# EAGLE board DCF77_RX_1V0 (EAGLE 7.7.0)
UFBmod - the best digital modulation ever created :-)
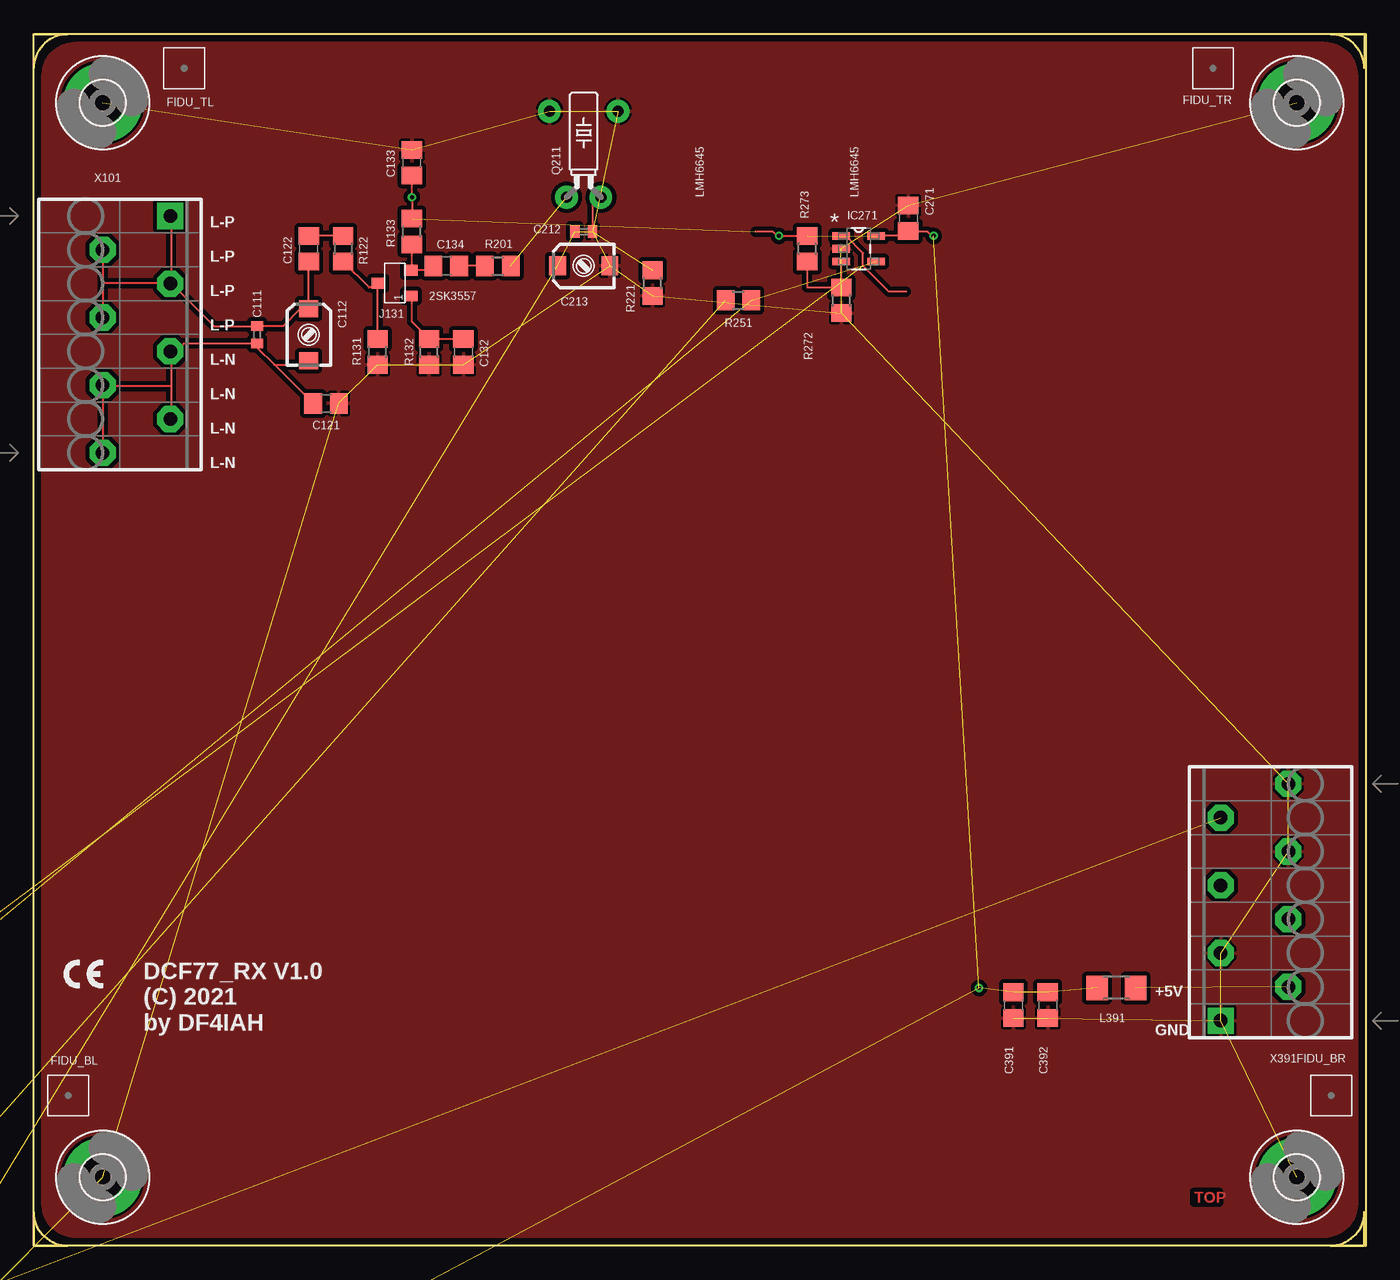
[diagram p0: board, top side]
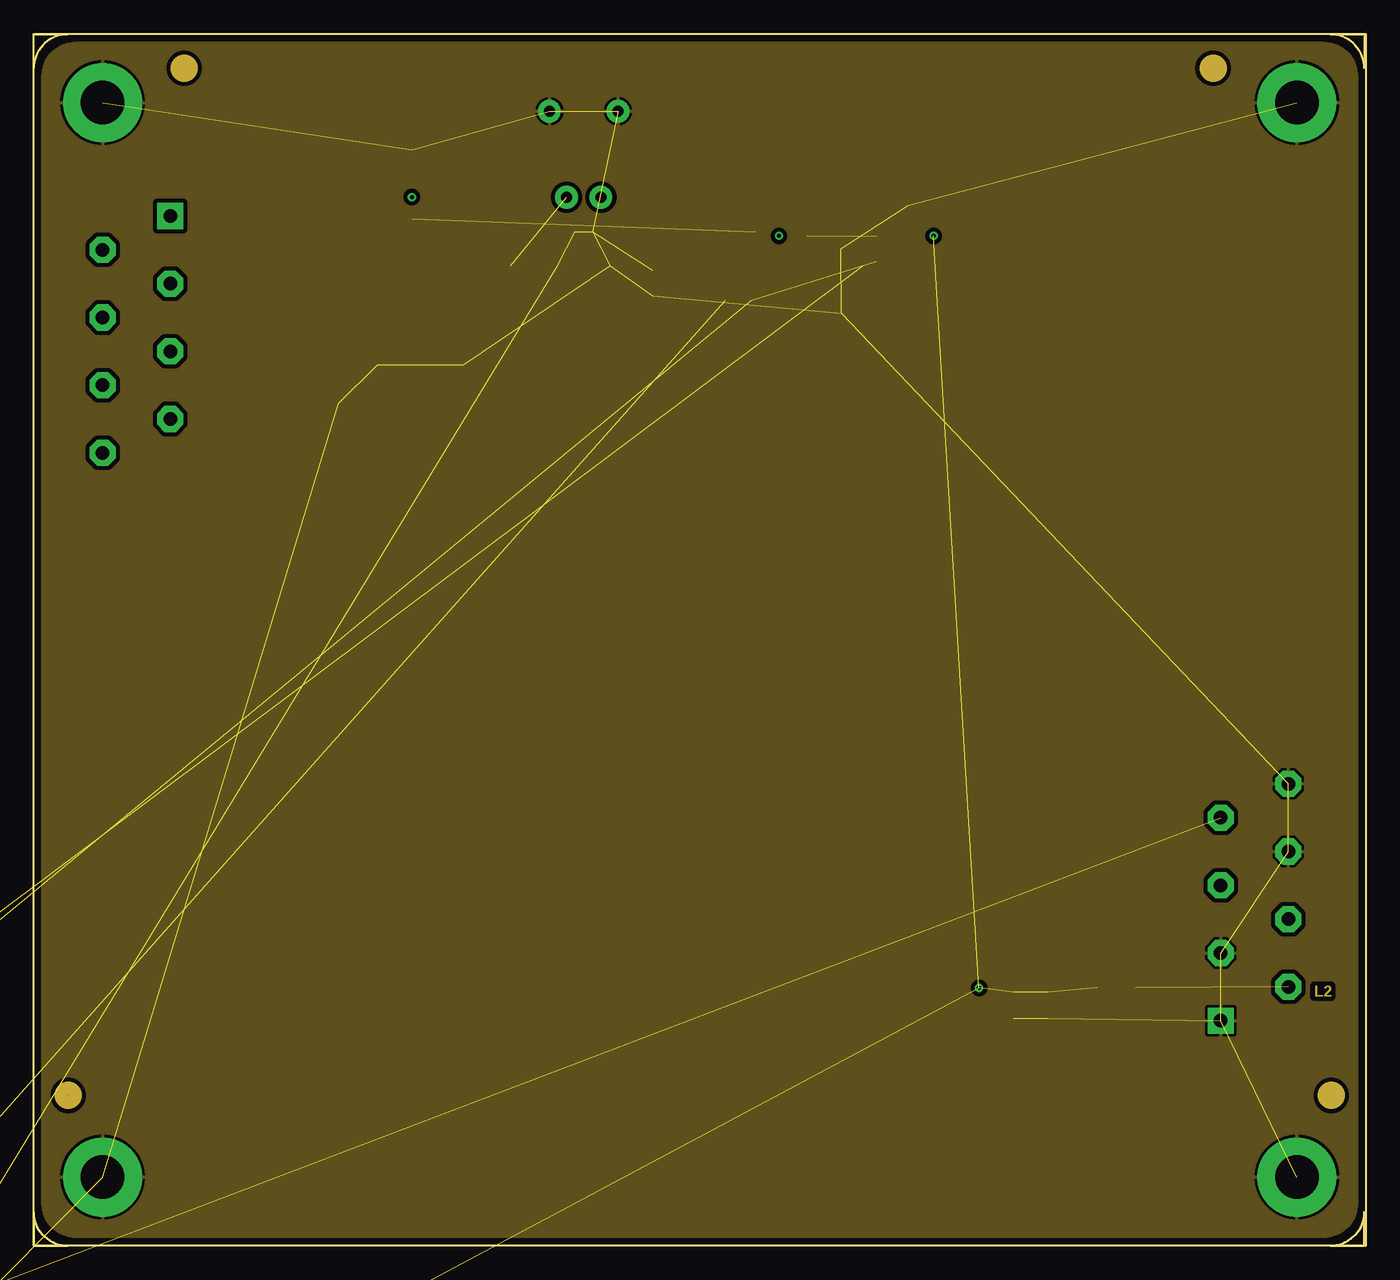
[diagram p1: board, inner layer Route2__GND_Pair_AVSS]
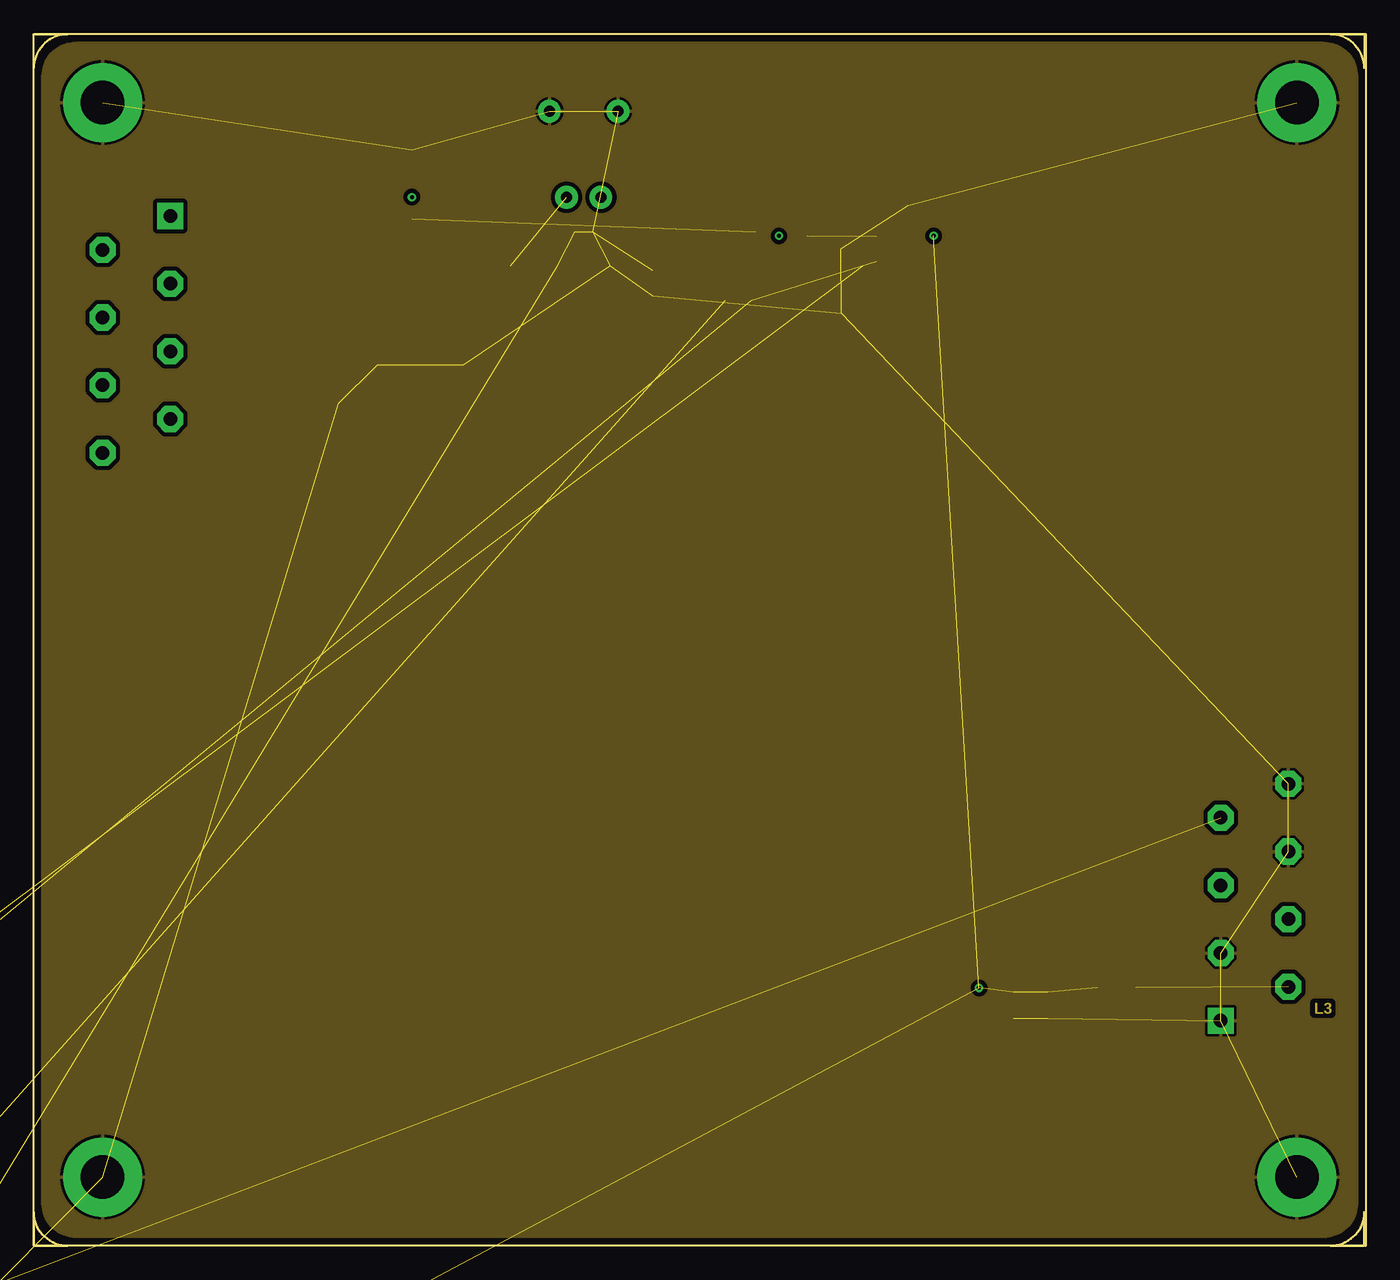
[diagram p2: board, inner layer Route3__SigC_GND]
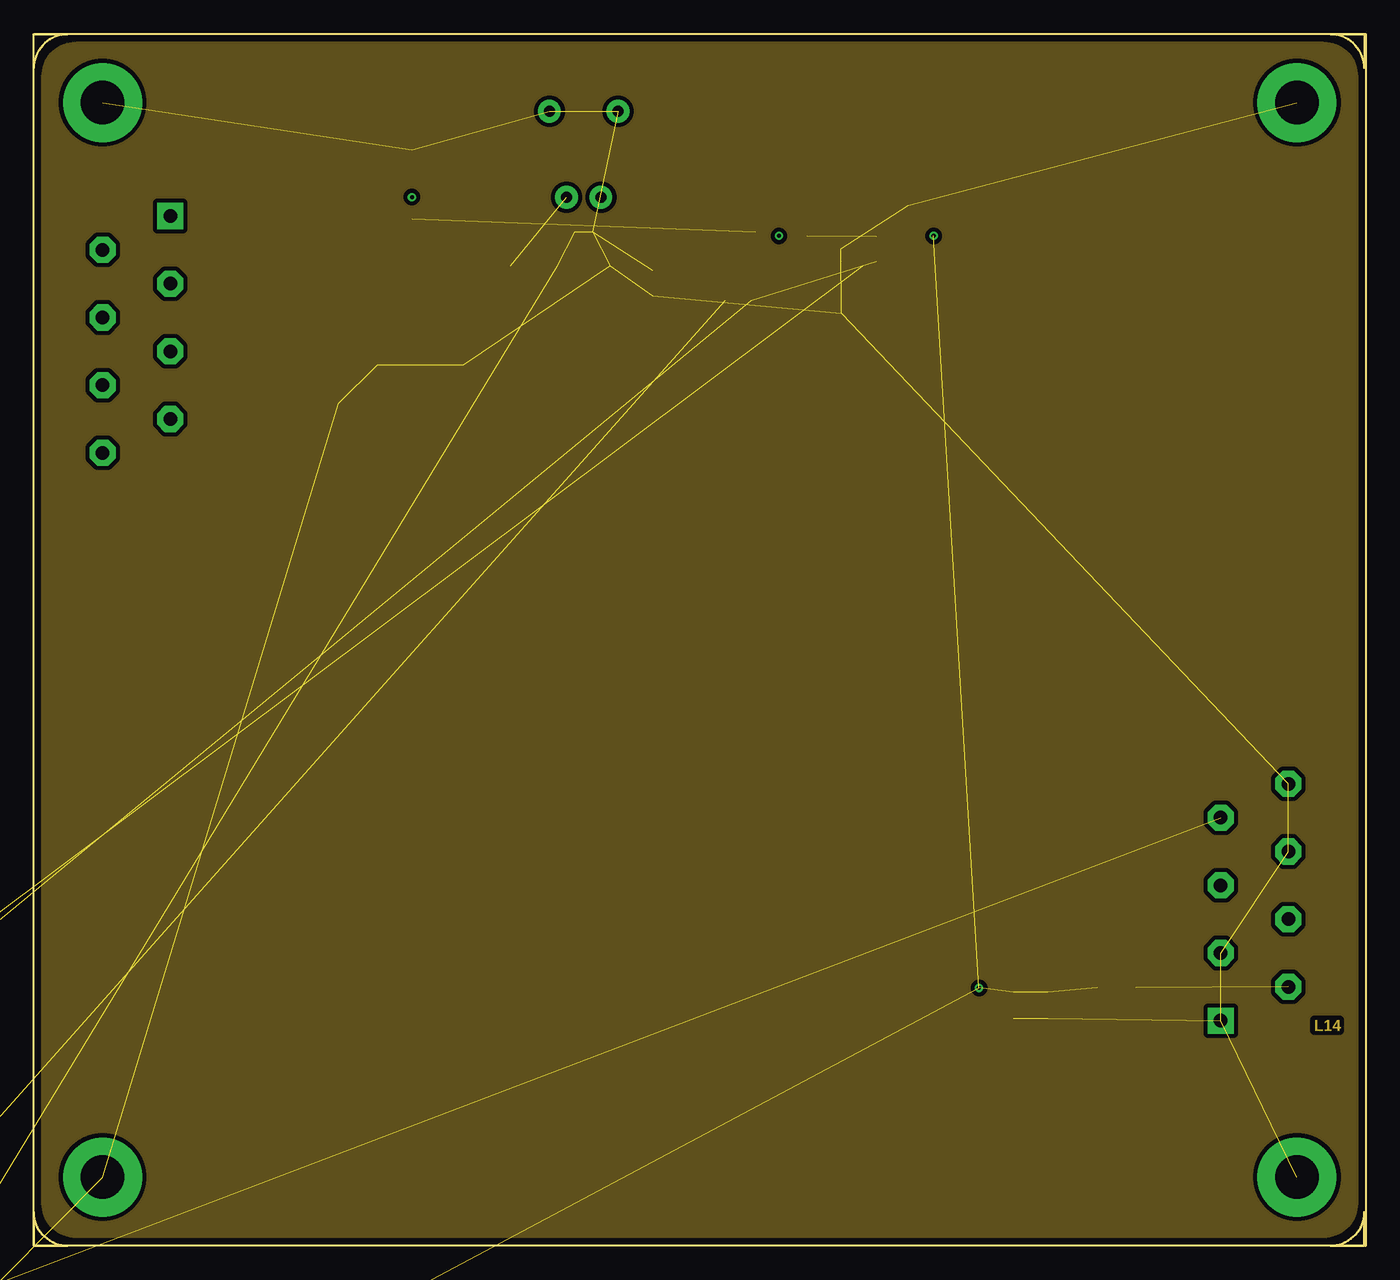
[diagram p3: board, inner layer Route14__VDD_SigD]
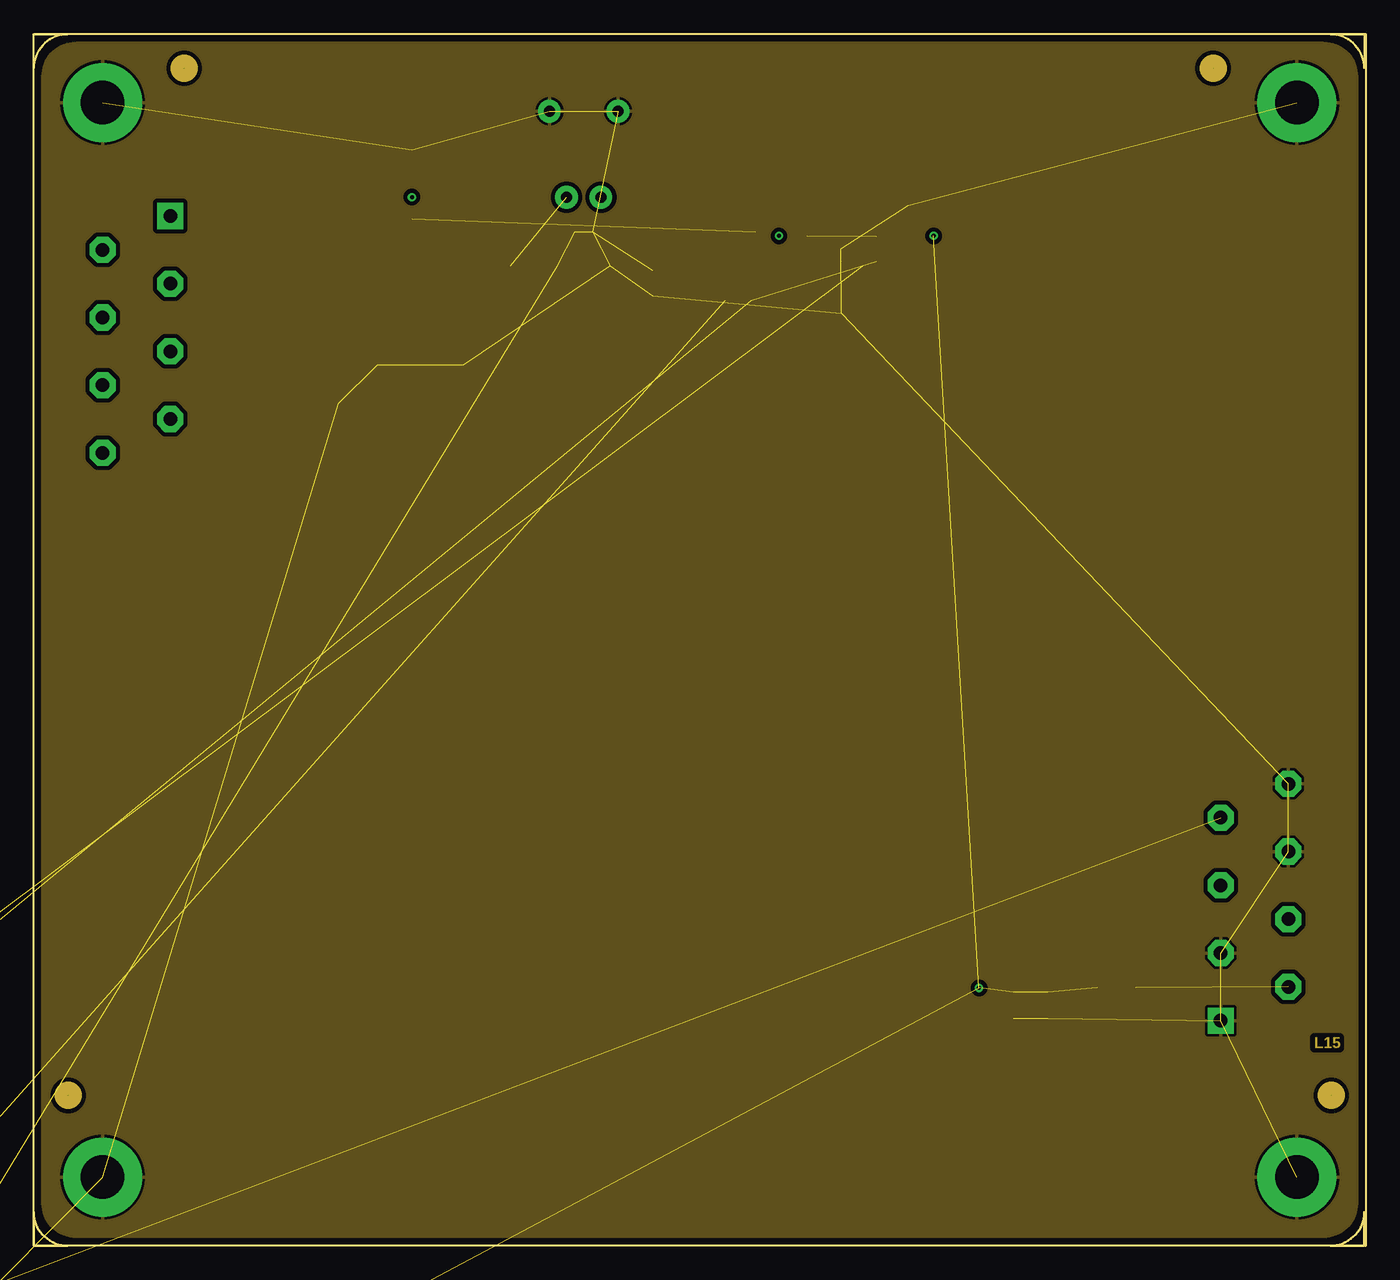
[diagram p4: board, inner layer Route15__GND_Pair]
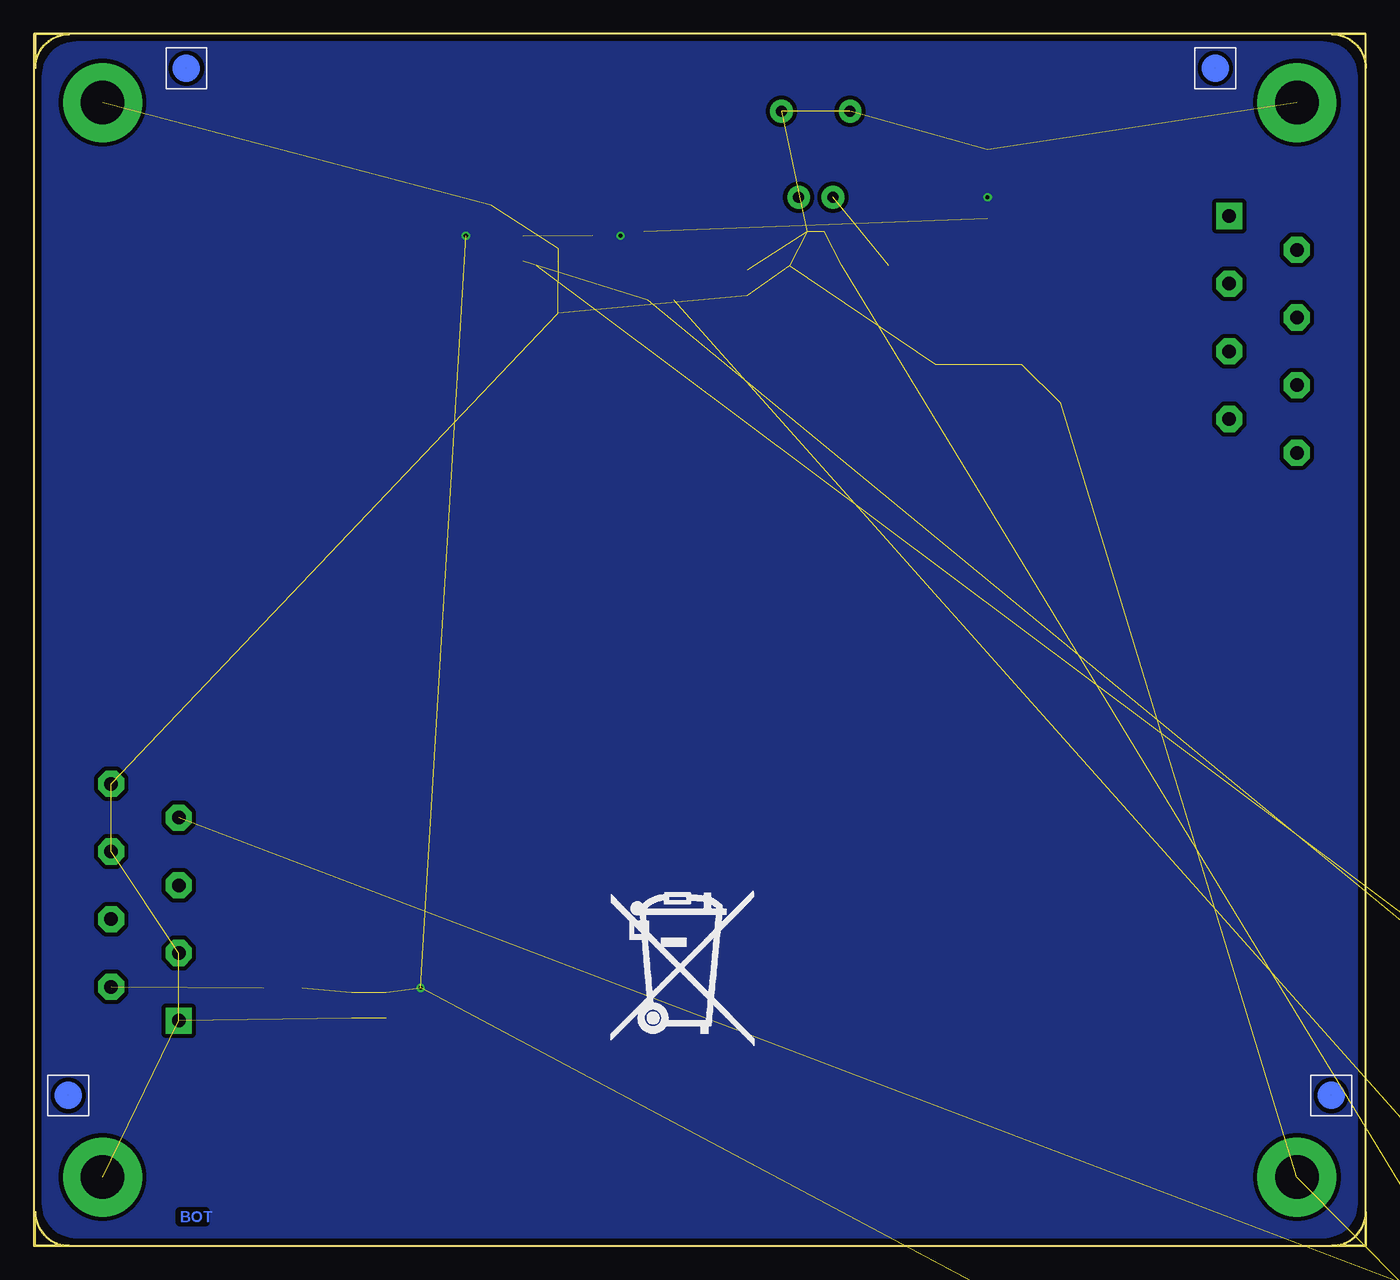
[diagram p5: board, bottom side, seen from below]

Size 98.42 x 89.53 mm. Coordinates in mm from the lower left corner, seen from the top.
Outline: 0,0 0,89.53 98.42,89.53 98.42,0 0,0
Copper layers (1*16): Top__SigA_Pair 0.035mm / dielectric 0.2mm / Bottom__SigB_Pair 0.035mm
Design rules "PCB-POOL Standard_ML6 *": minimum track width 0.15mm, minimum drill 0.3mm, track to track 0.15mm, track to pad 0.15mm, pad to pad 0.15mm, via to via 0.15mm, smd to smd 0.15mm, copper to edge 0.3mm, drill to drill 0.2mm, minimum pad ring 0.2mm, minimum via ring 0.15mm, stop-mask expansion 0.075mm, vias tented up to drill 0mil, thermal gap 0.2mm
Net classes: 0 default: width 0.127 mm, drill 0.3 mm, clearance 0.127 mm; 1 diff_100R_200u: width 0.203 mm, drill 0.3 mm, clearance 0.203 mm; 2 diff_100R_280u: width 0.229 mm, drill 0.3 mm, clearance 0.152 mm; 3 diff_100R_360u: width 0.267 mm, drill 0.3 mm, clearance 0.152 mm; 4 diff_90R_200u: width 0.216 mm, drill 0.3 mm, clearance 0.152 mm; 5 diff_90R_280u: width 0.292 mm, drill 0.3 mm, clearance 0.152 mm; 6 diff_90R_360u: width 0.318 mm, drill 0.3 mm, clearance 0.127 mm; 7 uni_50R_200u: width 0.343 mm, drill 0.3 mm, clearance 0.381 mm; 8 uni_50R_280u: width 0.483 mm, drill 0.3 mm, clearance 0.381 mm; 9 uni_50R_360u: width 0.635 mm, drill 0.3 mm, clearance 0.381 mm; 10 diff_50R_200u: width 0.508 mm, drill 0.3 mm, clearance 0.127 mm
Milling: area 0,87 to 2.5,89.5; area 0,0 to 2.5,2.5; area 95.8,0 to 98.3,2.5; area 95.8,87 to 98.3,89.5

## Footprints (pad centres in the part's own frame; a part is rotated, then mirrored left to right if it is on the bottom)
C0402 = smd 0.7 x 0.9: 1 -0.65,0; 2 0.65,0
4MM5_X_3MM2__EW_SGC3S = smd 1.4 x 1.25: CROT 0,1.925; CSTAT 0,-1.925
C0805 = smd 1.3 x 1.5: 1 -0.95,0; 2 0.95,0
3,2-PAD = drill 3.2 pad 5.842: B3,2 0,0
SOT-23-5 = smd 1.27 x 0.559: 1 -1.295,0.94; 2 -1.295,0; 3 -1.295,-0.94; 4 1.295,-0.94; 5 1.295,0.94
SOT23-3 = smd 0.8 x 1: P$1 -0.95,-1.2; P$2 0.95,-1.2; P$3 0,1.2
R1206 = smd 1.6 x 1.803: 1 -1.422,0; 2 1.422,0
QT26V_QST = drill 0.813 pad 1.676: 1 -1.27,0; 2 1.27,0; 3 -2.54,6.35; 4 2.54,6.35
R0805 = smd 1.3 x 1.5: 1 -0.95,0; 2 0.95,0
PT-10 = drill 1.016 pad 1.778 octagon: 1 -2.54,-5.08; 2 2.54,-5.08; 3 0,5.08
PHOENIX_1990067_1X8X2MM50_PTSA-0-5 = drill 1 pad 1.93 square: 1 -7.5,5 | drill 1 pad 1.93 octagon: 2 -5,0; 3 -2.5,5; 4 0,0; 5 2.5,5; 6 5,0; 7 7.5,5; 8 10,0

## Placement (x,y rotation side)
C111  10pF  [C0402]  16.51,67.31 270 top
C112  EW_SGC3S300  [4MM5_X_3MM2__EW_SGC3S]  20.32,67.31 0 top
C121  10nF  [C0805]  21.59,62.23 0 top
C122  10nF  [C0805]  20.32,73.66 90 top
C132  2.2uF  [C0805]  31.75,66.04 270 top
C133  10uF  [C0805]  27.94,80.01 90 top
C134  2.2nF  [C0805]  30.48,72.39 0 top
C212  1.5pF  [C0402]  40.64,74.93 0 top
C213  EW_SGC3S100  [4MM5_X_3MM2__EW_SGC3S]  40.64,72.39 90 top
C223  10uF  [C0805]  -31.75,-27.94 0 top  (outside the outline)
C251  100nF  [C0805]  -36.83,-27.94 0 top  (outside the outline)
C271  10uF  [C0805]  64.62,75.92 90 top
C391  10uF  [C0805]  72.39,17.78 270 top
C392  10nF  [C0805]  74.93,17.78 270 top
C395  47pF  [C0805]  -74.93,-39.37 0 top  (outside the outline)
FIDU_BL  [FIDUCIAL_MARK_1MM]  2.54,11.11 0 top
FIDU_BR  [FIDUCIAL_MARK_1MM]  95.89,11.11 0 top
FIDU_TL  [FIDUCIAL_MARK_1MM]  11.11,87 0 top
FIDU_TR  [FIDUCIAL_MARK_1MM]  87.15,87 0 top
H1511  MOUNT-PAD-ROUND3.2  [3,2-PAD]  5.08,84.45 0 top
H1512  MOUNT-PAD-ROUND3.2  [3,2-PAD]  5.08,5.08 0 top
H1513  MOUNT-PAD-ROUND3.2  [3,2-PAD]  93.34,84.45 0 top
H1514  MOUNT-PAD-ROUND3.2  [3,2-PAD]  93.34,5.08 0 top
IC271  LMH6645MF  [SOT-23-5]  60.96,73.66 0 top
J131  2SK3557  [SOT23-3]  26.67,71.12 90 top
J221  2SK3557  [SOT23-3]  -21.59,-27.94 0 top  (outside the outline)
L391  BEAD 300R  [R1206]  80.01,19.05 0 top
Q211  QT26V-77.000k  [QT26V_QST]  40.64,77.47 0 top
R122  10kR  [R0805]  22.86,73.66 270 top
R131  1MR  [R0805]  25.4,66.04 90 top
R132  68R  [R0805]  29.21,66.04 90 top
R133  390R  [R0805]  27.94,74.93 90 top
R201  10kR  [R0805]  34.29,72.39 0 top
R221  1MR  [R0805]  45.72,71.12 90 top
R222  390R  [R0805]  -26.67,-27.94 0 top  (outside the outline)
R251  1kR  [R0805]  52.07,69.85 0 top
R272  1kR  [R0805]  59.69,69.85 90 top
R273  1kR  [R0805]  57.15,73.66 90 top
R275  1kR  [R0805]  -64.77,-27.94 0 top  (outside the outline)
R276  100kR  [PT-10]  -50.8,-16.51 0 top  (outside the outline)
R279  1kR  [R0805]  -69.85,-27.94 0 top  (outside the outline)
X101  PHOENIX_1990067_1X8X2MM50_PTSA-0-5  [PHOENIX_1990067_1X8X2MM50_PTSA-0-5]  5.08,68.58 270 top
X391  PHOENIX_1990067_1X8X2MM50_PTSA-0-5  [PHOENIX_1990067_1X8X2MM50_PTSA-0-5]  92.71,24.13 90 top

## Library data of the parts
C111 C121 C122 C132-C134 C212 C223 C251 C271 C391 C392 C395 L391 R122 R131-R133 R201 R221 R222 R251 R272 R273 R275 R276 R279 = df4iah_rcl
C112 C213 = df4iah_c-trimm
FIDU_BL FIDU_BR FIDU_TL FIDU_TR = df4iah_fiducial
H1511-H1514 = df4iah_holes
IC271 = df4iah_opamp; OC_FARNELL: 1312813; OC_NEWARK: -; PACKAGE: SOT-23-5; SUPPLIER: Texas Instruments
J131 J221 = df4iah_jfet
Q211 = df4iah_crystal
X101 X391 = df4iah_connector

## Nets
+5V: C133.1 C223.1 C271.1 C391.1 C392.1 IC271.5 J221.P$2 L391.1 R133.2 R273.2
DIG_OUT: C395.1 R279.2 X391.7
FET_D: C134.2 R201.1
GND: C121.2 C132.2 C133.2 C212.2 C213.CSTAT C223.2 C271.2 C391.2 C392.2 C395.2 H1511.B3,2 H1512.B3,2 H1513.B3,2 H1514.B3,2 IC271.2 Q211.3 Q211.4 R131.1 R132.1 R221.1 R222.1 R272.1 X391.1 X391.3 X391.6 X391.8
N101: C111.2 C112.CSTAT C121.1 X101.5 X101.6 X101.7 X101.8
N102: C111.1 C112.CROT C122.1 X101.1 X101.2 X101.3 X101.4
N122: C122.2 R122.1
N131: J131.P$3 R122.2 R131.2
N132: C132.1 J131.P$1 R132.2
N133: C134.1 J131.P$2 R133.1
N221: C212.1 C213.CROT J221.P$3 Q211.2 R221.2
N222: C251.1 J221.P$1 R222.2
N251: C251.2 R251.1
N271: IC271.1 R276.3 R279.1
N272: IC271.3 R272.2 R273.1
N273: IC271.4 R251.2 R275.1
N275: R275.2 R276.1
N391: L391.2 X391.2
N$2: Q211.1 R201.2

## Tracks (layer width: path | path; a pad name or v marks a point on that pad's centre or on a via)
+3V3
  pour Route14__VDD_SigD (isolate 0.305, rank 2): 95.29,0.64 3.13,0.64 arc-90 0.64,3.13 0.64,86.4 arc-90 3.13,88.9 95.29,88.9 arc-90 97.79,86.4 97.79,3.13 arc-90
+5V  (via drill 0.3)  (8 unrouted)
  Top__SigA_Pair 0.15: IC271.5 62.55,74.61 64.14,74.61 64.45,74.93 C271.1 64.77,74.93 66.04,74.93 66.36,74.61 v66.5,74.61 | R133.2 v27.94,77.47 C133.1 | R273.2 55.24,74.61 v55.07,74.61 54.93,74.61 54.61,74.93 53.34,74.93
  other vias: 69.85,19.05
  pour Bottom__SigB_Pair (isolate 0.305): 95.29,0.64 3.13,0.64 arc-90 0.64,3.13 0.64,86.4 arc-90 3.13,88.9 95.29,88.9 arc-90 97.79,86.4 97.79,3.13 arc-90
DIG_OUT  (2 unrouted)
FET_D
  Top__SigA_Pair 0.15: R201.1 C134.2
GND  (25 unrouted)
  pour Top__SigA_Pair (isolate 0.305, rank 3): 95.29,0.64 3.13,0.64 arc-90 0.64,3.13 0.64,86.4 arc-90 3.13,88.9 95.29,88.9 arc-90 97.79,86.4 97.79,3.13 arc-90
  pour Route2__GND_Pair_AVSS (isolate 0.305, rank 2): 95.29,0.64 3.13,0.64 arc-90 0.64,3.13 0.64,86.4 arc-90 3.13,88.9 95.29,88.9 arc-90 97.79,86.4 97.79,3.13 arc-90
  pour Route15__GND_Pair (isolate 0.305, rank 2): 95.29,0.64 3.13,0.64 arc-90 0.64,3.13 0.64,86.4 arc-90 3.13,88.9 95.29,88.9 arc-90 97.79,86.4 97.79,3.13 arc-90
  pour Route3__SigC_GND (isolate 0.305, rank 2): 95.29,0.64 3.13,0.64 arc-90 0.64,3.13 0.64,86.4 arc-90 3.13,88.9 95.29,88.9 arc-90 97.79,86.4 97.79,3.13 arc-90
N101
  Top__SigA_Pair 0.15: 5.08,63.5 X101.8 | 17.78,65.09 C121.1 | 17.78,65.09 16.51,66.36 C111.2 16.51,66.67 11.11,66.67 10.16,65.72 | 17.78,65.09 20.32,65.09 C112.CSTAT | 10.16,65.72 10.16,66.04 X101.5 10.16,65.72 | 10.16,65.72 10.16,63.5 | 10.16,63.5 10.16,61.28 X101.7 | 10.16,63.5 5.08,63.5 | 5.08,63.5 X101.6
N102
  Top__SigA_Pair 0.15: X101.2 5.08,71.12 | 5.08,71.12 X101.4 | 16.51,67.94 18.41,67.94 19.68,69.22 20.32,69.22 C112.CROT C122.1 | 10.16,71.12 10.16,75.88 X101.1 | 16.51,67.94 13.34,67.94 10.16,71.12 | 16.51,67.94 C111.1 | 10.16,71.12 X101.3 9.84,71.12 5.08,71.12
N122
  Top__SigA_Pair 0.15: C122.2 R122.1
N131
  Top__SigA_Pair 0.15: R131.2 25.4,70.8 | 25.4,70.8 25.4,71.12 J131.P$3 25.4,70.8 | 25.4,70.8 24.77,70.8 R122.2
N132
  Top__SigA_Pair 0.15: R132.2 27.94,68.26 27.94,70.17 J131.P$1 | R132.2 C132.1 | R132.2
N133
  Top__SigA_Pair 0.15: 27.94,72.07 29.21,72.07 C134.1 | 27.94,72.07 R133.1 | 27.94,72.07 J131.P$2
N221  (4 unrouted)
  Top__SigA_Pair 0.15: 41.27,74.93 41.27,76.83 Q211.2
N222  (2 unrouted)
N251  (1 unrouted)
N271  (2 unrouted)
  Top__SigA_Pair 0.15: 64.45,70.48 63.18,70.48 61.28,72.39 61.28,73.34 60.01,74.61 59.69,74.61 IC271.1
N272  (1 unrouted)
  Top__SigA_Pair 0.15: R272.2 59.69,72.71 | R273.1 57.15,70.8 R272.2 | R272.2
N273  (2 unrouted)
N275  (1 unrouted)
N391  (1 unrouted)
N$2  (1 unrouted)

## Text on the board
Top__SigA_Pair: TOP
Route2__GND_Pair_AVSS: L2
Route3__SigC_GND: L3
Route14__VDD_SigD: L14
Route15__GND_Pair: L15
Bottom__SigB_Pair: BOT
tPlace: L-P | L-P | L-P | L-P | L-N | L-N | L-N | L-N | +5V | DCF77_RX V1.0 / (C) 2021 / by DF4IAH | GND
tNames: LMH6645 | LMH6645 | 2SK3557